# Altium PCB Brain_Stim_Final_Layout.PcbDoc (part 3 of 3)
Units mil, origin at the board's own origin, x right, y up, seen from the top; angles counter-clockwise.
Board outline 3530 x 5285 mil, 4 copper layers (Top Layer, Layer 1, Layer 2, Bottom Layer), stack 62.449 mil thick; 148 components, 116 nets, 618 pads, 378 vias.
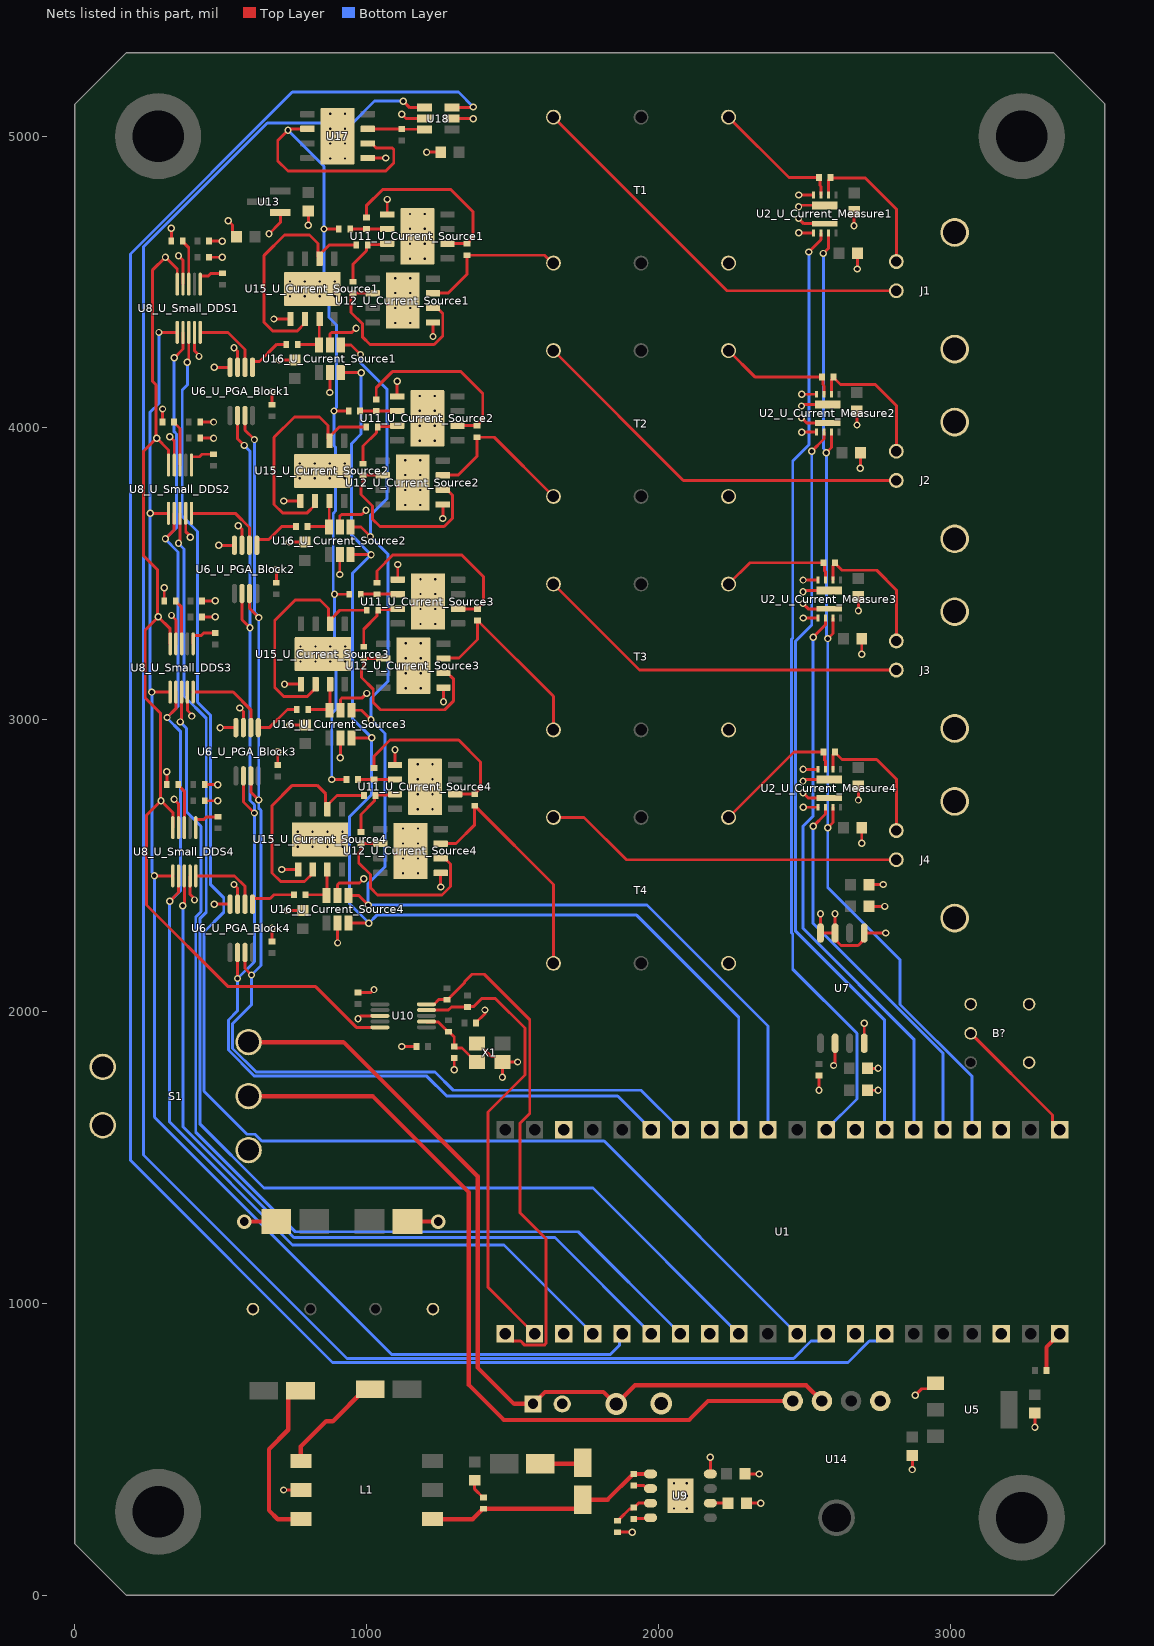
[diagram p4: the nets of this part, all layers, seen from the top]

## Via types
v1: diameter 25, hole 15, Top Layer to Bottom Layer, 234 vias
v2: diameter 19.68, hole 7.87, Top Layer to Bottom Layer, 58 vias
v3: diameter 19.68, hole 7.87, Top Layer to Bottom Layer, tented both sides, 52 vias
v4: diameter 19.68, hole 11.81, Top Layer to Bottom Layer, 27 vias
v5: diameter 50, hole 30, Top Layer to Bottom Layer, 5 vias
v6: diameter 75, hole 45, Top Layer to Bottom Layer, 2 vias

## Nets (pads, with @x,y where several pads share a name; then routed paths per layer and width w, separated by ;. In a path a pad name is that pad's centre, name@x,y a point inside that pad or via, vN(x,y) a via of type N, cw(c..) or ccw(c..) an arc to the next point about the centre after c; other vN are vias at no path point) (continued)
ADC_CLK: U1.GP2 U2_U_Current_Measure1.7 U2_U_Current_Measure2.7 U2_U_Current_Measure3.7 U2_U_Current_Measure4.7 | length 3525.8
  Top Layer w10: v1(2565,4597.99) 2582.8,4615.79 U2_U_Current_Measure1.7@2582.8,4668.5 ; v1(2575,3915) 2592.8,3932.8 U2_U_Current_Measure2.7@2592.8,3985.51 ; v1(2580,2629.53) 2597.8,2647.32 U2_U_Current_Measure4.7@2597.8,2700.04 ; v1(2580,3277.99) 2597.8,3295.79 U2_U_Current_Measure3.7@2597.8,3348.5
  Bottom Layer w10: v1(2565,4597.99) 2565,3929.06 2575,3919.06 v1(2575,3915) 2575,3287.05 2580,3282.05 v1(2580,3277.99) v1(2580,2629.53) 2580,2425 2827.5,2177.5 2827.5,2024.15 3075,1776.65 U1.GP2@3075,1595
ADC_DATA1: U1.GP6 U2_U_Current_Measure1.6 | length 3251.7
  Top Layer w10: v1(2515,4602.99) 2557.2,4645.2 U2_U_Current_Measure1.6@2557.2,4668.5
  Bottom Layer w10: v1(2515,4602.99) 2515,3941.82 2460,3886.82 2460,3279.8 2456,3275.8 2456,2269.2 2460,2265.2 2460,2145 2680,1925 2680,1700 U1.GP6@2575,1595
ADC_DATA2: U1.GP5 U2_U_Current_Measure2.6 | length 2557.1
  Top Layer w10: v1(2525,3920) 2567.2,3962.2 U2_U_Current_Measure2.6@2567.2,3985.51
  Bottom Layer w10: v1(2525,3920) 2525,3325 2470,3270 2470,2275 2775,1970 U1.GP5@2775,1595
ADC_DATA3: U1.GP4 U2_U_Current_Measure3.6 | length 1942.9
  Top Layer w10: v1(2530,3282.99) 2572.2,3325.2 U2_U_Current_Measure3.6@2572.2,3348.5
  Bottom Layer w10: v1(2530,3282.99) 2530,2670 2495,2635 2495,2285 2875,1905 U1.GP4@2875,1595
ADC_DATA4: U1.GP3 U2_U_Current_Measure4.6 | length 1306.8
  Top Layer w10: v1(2530,2634.53) 2572.2,2676.73 U2_U_Current_Measure4.6@2572.2,2700.04
  Bottom Layer w10: v1(2530,2634.53) 2530,2301.85 2975,1856.85 U1.GP3@2975,1595
AGND: C14_U_Current_Measure1.1 C14_U_Current_Measure2.1 C14_U_Current_Measure3.1 C14_U_Current_Measure4.1 C25.1 C26.1 U2_U_Current_Measure1.4 U2_U_Current_Measure1.9 U2_U_Current_Measure2.4 U2_U_Current_Measure2.9 U2_U_Current_Measure3.4 U2_U_Current_Measure3.9 U2_U_Current_Measure4.4 U2_U_Current_Measure4.9 U7.5 U7.7 U7.8 | length 1285.6
  Top Layer w10: v1(2480,4757.99) 2485,4762.99 U2_U_Current_Measure1.9@2570,4762.99 ; v1(2480.43,4798.43) U2_U_Current_Measure1.4@2531.61,4798.43 ; v1(2490,4075) 2495,4080 U2_U_Current_Measure2.9@2580,4080 ; v1(2490.43,4115.43) U2_U_Current_Measure2.4@2541.61,4115.43 ; v1(2495,2789.53) 2500,2794.53 U2_U_Current_Measure4.9@2585,2794.53 ; v1(2495,3437.99) 2500,3442.99 U2_U_Current_Measure3.9@2585,3442.99 ; v1(2495.43,2829.96) U2_U_Current_Measure4.4@2546.61,2829.96 ; v1(2495.43,3478.43) U2_U_Current_Measure3.4@2546.61,3478.43 ; v1(2555,2335) U7.8@2555,2268.98 U7.7@2605,2268.98 ; v1(2605,2335) U7.7@2605,2268.98 ; v1(2670,4692.99) C14_U_Current_Measure1.1@2670,4741.5 ; v1(2680,4010) C14_U_Current_Measure2.1@2680,4058.5 ; v1(2685,2724.53) C14_U_Current_Measure4.1@2685,2773.03 ; v1(2685,3372.99) C14_U_Current_Measure3.1@2685,3421.5 ; C25.1@2721.5,2360 v1(2775,2360) ; C26.1@2721.5,2435 v1(2770,2435) ; v1(2778.98,2268.98) U7.5@2705,2268.98 2705,2247.32 2684.19,2226.51 2625.81,2226.51 2605,2247.32 U7.7@2605,2268.98
ATT_\C\S\_U_Current_Source1: 
ATT_\C\S\_U_Current_Source2: 
ATT_\C\S\_U_Current_Source3: 
ATT_\C\S\_U_Current_Source4: 
ATT_C\S\: U1.GP8 U16_U_Current_Source1.4 U16_U_Current_Source2.4 U16_U_Current_Source3.4 U16_U_Current_Source4.4 | length 4261.1
  Top Layer w10: U16_U_Current_Source1.4@910.91,4283.74 946.26,4283.74 v1(978.5,4251.5) ; U16_U_Current_Source4.4@937.4,2397.24 972.76,2397.24 v1(1005,2365) ; U16_U_Current_Source2.4@945,3660 980.35,3660 v1(1012.6,3627.76) ; U16_U_Current_Source3.4@947.09,3032.24 982.44,3032.24 v1(1014.69,3000)
  Bottom Layer w10: v1(978.5,4251.5) 978.5,4223.32 1070.1,4131.72 1070.1,3758.44 1012.6,3700.94 v1(1012.6,3627.76) 1072.19,3568.17 1072.19,3130.68 1014.69,3073.18 v1(1014.69,3000) 1062.5,2952.19 1062.5,2495.68 1005,2438.18 v1(1005,2365) 1960,2365 2375,1950 U1.GP8@2375,1595
ATT_SIG_U_Current_Source1: R15_U_Current_Source1.2 U15_U_Current_Source1.3 U16_U_Current_Source1.6 | length 164.5
  Top Layer w10: R15_U_Current_Source1.2@763.19,4286.5 833.35,4286.5 U16_U_Current_Source1.6@836.1,4283.74 837.3,4284.94 837.3,4371.95 U15_U_Current_Source1.3@838.5,4373.15
ATT_SIG_U_Current_Source2: R15_U_Current_Source2.2 U15_U_Current_Source2.3 U16_U_Current_Source2.6 | length 164.5
  Top Layer w10: R15_U_Current_Source2.2@797.28,3662.76 867.44,3662.76 U16_U_Current_Source2.6@870.2,3660 871.4,3661.2 871.4,3748.21 U15_U_Current_Source2.3@872.6,3749.41
ATT_SIG_U_Current_Source3: R15_U_Current_Source3.2 U15_U_Current_Source3.3 U16_U_Current_Source3.6 | length 164.5
  Top Layer w10: R15_U_Current_Source3.2@799.37,3035 869.53,3035 U16_U_Current_Source3.6@872.28,3032.24 873.48,3033.44 873.48,3120.45 U15_U_Current_Source3.3@874.69,3121.65
ATT_SIG_U_Current_Source4: R15_U_Current_Source4.2 U15_U_Current_Source4.3 U16_U_Current_Source4.6 | length 164.5
  Top Layer w10: R15_U_Current_Source4.2@789.69,2400 859.84,2400 U16_U_Current_Source4.6@862.6,2397.24 863.8,2398.44 863.8,2485.45 U15_U_Current_Source4.3@865,2486.65
ATT_U/\D\_U_Current_Source1: 
ATT_U/\D\_U_Current_Source2: 
ATT_U/\D\_U_Current_Source3: 
ATT_U/\D\_U_Current_Source4: 
ATT_U/D\: U1.GP9 U16_U_Current_Source1.3 U16_U_Current_Source2.3 U16_U_Current_Source3.3 U16_U_Current_Source4.3 | length 4128.9
  Top Layer w10: U16_U_Current_Source1.3@910.91,4189.25 v1(980.75,4189.25) ; U16_U_Current_Source4.3@937.4,2302.76 v1(1007.24,2302.76) ; U16_U_Current_Source2.3@945,3565.51 v1(1014.84,3565.51) ; U16_U_Current_Source3.3@947.09,2937.76 v1(1016.93,2937.76)
  Bottom Layer w10: v1(980.75,4189.25) 980.75,3978.79 948.44,3946.49 948.44,3631.91 v1(1014.84,3565.51) 950.53,3501.2 950.53,3004.15 v1(1016.93,2937.76) 1016.93,2743.56 940.85,2667.47 940.85,2369.15 v1(1007.24,2302.76) 1034.49,2330 1925,2330 2275,1980 U1.GP9@2275,1595
CH_AMP1: R15_U_Current_Source1.1 U6_U_PGA_Block1.1 | length 157.5
  Top Layer w10: U6_U_PGA_Block1.1@608.39,4207.68 608.39,4223.72 611.95,4227.28 632.62,4227.28 691.83,4286.5 R15_U_Current_Source1.1@723.82,4286.5
CH_AMP2: R15_U_Current_Source2.1 U6_U_PGA_Block2.1 | length 170.9
  Top Layer w10: U6_U_PGA_Block2.1@623.39,3597.68 623.39,3613.72 626.95,3617.28 664.04,3617.28 709.51,3662.76 R15_U_Current_Source2.1@757.91,3662.76
CH_AMP3: R15_U_Current_Source3.1 U6_U_PGA_Block3.1 | length 157.4
  Top Layer w10: U6_U_PGA_Block3.1@628.39,2972.68 665.8,2972.68 728.12,3035 R15_U_Current_Source3.1@760,3035
CH_AMP4: R15_U_Current_Source4.1 U6_U_PGA_Block4.1 | length 164.7
  Top Layer w10: U6_U_PGA_Block4.1@608.39,2367.68 608.39,2383.72 611.95,2387.28 669.11,2387.28 681.83,2400 R15_U_Current_Source4.1@750.31,2400
CLK_SCL: R5.1 U1.GP17 U10.4 | length 1562.8
  Top Layer w10: U10.4@1204.72,2004.68 1279.45,2004.68 1290.08,2015.32 R5.1@1345,2015.32 1346.58,2016.89 1366.89,2016.89 1395,2045 1440,2045 1542.01,1942.99 1542.01,1782.01 1415.36,1655.36 1415.36,1054.64 U1.GP17@1575,895
CLK_SDA: R6.1 U1.GP16 U10.5 | length 1780.6
  Top Layer w10: U10.5@1204.72,2024.37 1230.31,2024.37 1246.26,2040.32 R6.1@1275,2040.32 1276.97,2040.32 1320,2083.35 1334.75,2098.09 1334.75,2101.57 1360.68,2127.5 1402.5,2127.5 1558.51,1971.49 1558.51,1650.61 1525,1617.1 1525,1310.14 1613.69,1221.45 1613.69,861.59 1608.41,856.31 1541.59,856.31 1527.59,870.31 1499.69,870.31 U1.GP16@1475,895
CS_MID_U_Current_Source1: R11_U_Current_Source1.2 R11_U_Current_Source2.2 R11_U_Current_Source3.2 R11_U_Current_Source4.2 U17.2 U17.6 | length 3270.5
  Top Layer w10: U17.6@796.65,5025 739.06,5025 734.06,5020 v1(730,5020) 695,4985 695,4915 730,4880 1065,4880 1092.5,4907.5 1092.5,4954.14 1086.64,4960 1032.13,4960 1017.13,4975 U17.2@1003.35,4975 ; v1(853.5,4681.5) R11_U_Current_Source1.2@903.82,4681.5 ; v1(880,2795) R11_U_Current_Source4.2@930.31,2795 ; v1(887.6,4057.76) R11_U_Current_Source2.2@937.91,4057.76 ; v1(889.69,3430) R11_U_Current_Source3.2@940,3430
  Bottom Layer w10: v1(730,5020) 853.5,4896.5 v1(853.5,4681.5) 853.5,4515.74 870.43,4498.81 870.43,4378.15 896,4352.58 896,4070.22 887.6,4061.81 v1(887.6,4057.76) 887.6,3939.04 893.03,3933.6 893.03,3714.99 885.1,3707.05 885.1,3438.65 889.69,3434.06 v1(889.69,3430) 889.69,3264.24 895.12,3258.81 895.12,3036.49 880,3021.38 v1(880,2795)
CS_OUT1: R12_U_Current_Source1.1 T1.1 U12_U_Current_Source1.3 | length 516.5
  Top Layer w10: U12_U_Current_Source1.3@1226.85,4461.5 1227.98,4462.63 1279.64,4462.63 1343.5,4526.5 R12_U_Current_Source1.1@1343.5,4591.81 1609.41,4591.81 1636.22,4565 T1.1@1640,4565
CS_OUT2: R12_U_Current_Source2.1 T2.1 U12_U_Current_Source2.3 | length 555.4
  Top Layer w10: U12_U_Current_Source2.3@1260.94,3837.76 1262.08,3838.89 1313.73,3838.89 1377.6,3902.76 R12_U_Current_Source2.1@1377.6,3968.07 1436.93,3968.07 T2.1@1640,3765
CS_OUT3: R12_U_Current_Source3.1 T3.1 U12_U_Current_Source3.3 | length 693.2
  Top Layer w10: U12_U_Current_Source3.3@1263.03,3210 1264.16,3211.13 1315.82,3211.13 1379.69,3275 R12_U_Current_Source3.1@1379.69,3340.31 1381.65,3340.31 1386.5,3335.47 1386.5,3333.5 1640,3080 T3.1@1640,2965
CS_OUT4: R12_U_Current_Source4.1 T4.1 U12_U_Current_Source4.3 | length 862.2
  Top Layer w10: U12_U_Current_Source4.3@1253.35,2575 1254.48,2576.13 1306.13,2576.13 1370,2640 R12_U_Current_Source4.1@1370,2705.32 1371.97,2705.32 1376.81,2700.47 1376.81,2698.5 1640,2435.32 T4.1@1640,2165
DDS_CLK: U8_U_Small_DDS1.5 U8_U_Small_DDS2.5 U8_U_Small_DDS3.5 U8_U_Small_DDS4.5 U10.10 | length 3756.2
  Top Layer w10: U8_U_Small_DDS2.5@320.63,3872.68 320.63,3924.37 v1(280,3965) ; U8_U_Small_DDS3.5@326.26,3260 326.26,3311.69 v1(285.63,3352.32) ; U8_U_Small_DDS4.5@335.31,2630 335.31,2681.69 v1(294.69,2722.32) ; U8_U_Small_DDS1.5@350.63,4492.68 350.63,4544.37 v1(310,4585) 265.18,4540.18 265.18,4160.26 277.81,4147.62 277.81,3967.19 v1(280,3965) ; U10.10@1045.28,1945.63 964.37,1945.63 825,2085 525,2085 245,2365 245,2672.64 v1(294.69,2722.32) ; v1(280,3965) 235.18,3920.18 235.18,3561.74 283.44,3513.47 283.44,3354.51 v1(285.63,3352.32) ; v1(285.63,3352.32) 240.81,3307.5 240.81,3074.19 292.5,3022.5 292.5,2724.51 v1(294.69,2722.32)
DDS_FSYNC1: U1.GP26_A0 U8_U_Small_DDS1.8 | length 5074.3
  Top Layer w10: v1(385,4225) 385,4229.06 390,4234.06 U8_U_Small_DDS1.8@390,4327.32
  Bottom Layer w10: v1(385,4225) 385,4146.75 367.81,4129.56 367.81,3697.19 420,3645 420,3060 464,3016 464,2436 510,2390 510,2340 442,2272 442,1726.85 589.61,1579.24 617.48,1579.24 640.4,1556.31 1813.69,1556.31 U1.GP26_A0@2475,895
DDS_FSYNC2: U1.GP22 U8_U_Small_DDS2.8 | length 4288
  Top Layer w10: v1(355,3605) 355,3609.06 360,3614.06 U8_U_Small_DDS2.8@360,3707.32
  Bottom Layer w10: v1(355,3605) 355,3603 373.44,3584.55 373.44,3081.56 450,3005 450,2340 428,2318 428,1615.2 648.2,1395 1775,1395 U1.GP22@2275,895
DDS_FSYNC3: U1.GP21 U8_U_Small_DDS3.8 | length 3495.1
  Top Layer w10: v1(360.63,2992.32) 360.63,2996.38 365.63,3001.38 U8_U_Small_DDS3.8@365.63,3094.65
  Bottom Layer w10: v1(360.63,2992.32) 382.5,2970.45 382.5,2684.13 432.19,2634.45 432.19,2341.98 414,2323.8 414,1586 755,1245 1725,1245 U1.GP21@2075,895
DDS_FSYNC4: U1.GP20 U8_U_Small_DDS4.8 | length 2760.9
  Top Layer w10: v1(369.69,2362.32) 369.69,2366.38 374.69,2371.38 U8_U_Small_DDS4.8@374.69,2464.65
  Bottom Layer w10: v1(369.69,2362.32) 369.69,1605.32 750,1225 1645,1225 U1.GP20@1975,895
DDS_OUT1: U6_U_PGA_Block1.2 U8_U_Small_DDS1.10 | length 238.9
  Top Layer w10: U8_U_Small_DDS1.10@429.37,4327.32 524.5,4327.32 582.8,4269.02 U6_U_PGA_Block1.2@582.8,4207.68
DDS_OUT2: U6_U_PGA_Block2.2 U8_U_Small_DDS2.10 | length 279.8
  Top Layer w10: U8_U_Small_DDS2.10@399.37,3707.32 549.5,3707.32 597.8,3659.02 U6_U_PGA_Block2.2@597.8,3597.68
DDS_OUT3: U6_U_PGA_Block3.2 U8_U_Small_DDS3.10 | length 284.3
  Top Layer w10: U8_U_Small_DDS3.10@405,3094.65 542.17,3094.65 602.8,3034.02 U6_U_PGA_Block3.2@602.8,2972.68
DDS_OUT4: U6_U_PGA_Block4.2 U8_U_Small_DDS4.10 | length 244.8
  Top Layer w10: U8_U_Small_DDS4.10@414.06,2464.65 547.17,2464.65 582.8,2429.02 U6_U_PGA_Block4.2@582.8,2367.68
DDS_SCLK: U1.GP18 U8_U_Small_DDS1.7 U8_U_Small_DDS2.7 U8_U_Small_DDS3.7 U8_U_Small_DDS4.7 | length 4856.6
  Top Layer w10: v1(310,3620) 339.97,3649.97 339.97,3706.98 U8_U_Small_DDS2.7@340.31,3707.32 ; v1(315.63,3007.32) 345.6,3037.29 345.6,3094.3 U8_U_Small_DDS3.7@345.94,3094.65 ; v1(324.69,2377.32) 354.65,2407.29 354.65,2464.3 U8_U_Small_DDS4.7@355,2464.65 ; v1(340,4240) 369.97,4269.97 369.97,4326.98 U8_U_Small_DDS1.7@370.31,4327.32
  Bottom Layer w10: v1(340,4240) 340,3986.82 347.5,3979.32 347.5,3657.5 v1(310,3620) 310,3618.18 353.13,3575.05 353.13,3044.82 v1(315.63,3007.32) 315.63,3005.5 362.19,2958.95 362.19,2414.82 v1(324.69,2377.32) 324.69,1620.72 745.4,1200 1470,1200 U1.GP18@1775,895
DDS_SDAT: U1.GP19 U8_U_Small_DDS1.6 U8_U_Small_DDS2.6 U8_U_Small_DDS3.6 U8_U_Small_DDS4.6 | length 4946
  Top Layer w10: v1(257.68,3707.32) U8_U_Small_DDS2.6@320.63,3707.32 ; v1(263.31,3094.65) U8_U_Small_DDS3.6@326.26,3094.65 ; v1(272.36,2464.65) U8_U_Small_DDS4.6@335.31,2464.65 ; v1(287.68,4327.32) U8_U_Small_DDS1.6@350.63,4327.32
  Bottom Layer w10: v1(287.68,4327.32) 287.68,4083.87 257.5,4053.69 257.5,3707.5 v1(257.68,3707.32) 257.68,3104.33 263.31,3098.7 v1(263.31,3094.65) 263.31,2477.76 272.36,2468.7 v1(272.36,2464.65) 272.36,1637.64 1085,825 1835,825 1866.17,856.17 1866.17,886.17 U1.GP19@1875,895
FROM_BRAIN1: J1.2 R7_U_Current_Measure1.1 U2_U_Current_Measure1.2 | length 509.6
  Top Layer w10: U2_U_Current_Measure1.2@2582.8,4798.43 2582.8,4849.13 2589.69,4856.02 2708.79,4856.02 2815,4749.81 J1.2@2815,4570
FROM_BRAIN2: J2.2 R7_U_Current_Measure2.1 U2_U_Current_Measure2.2 | length 472.4
  Top Layer w10: U2_U_Current_Measure2.2@2592.8,4115.43 2592.8,4166.14 2599.69,4173.03 2623.52,4149.2 2742.62,4149.2 2815,4076.82 J2.2@2815,3920
FROM_BRAIN3: J3.2 R7_U_Current_Measure3.1 U2_U_Current_Measure3.2 | length 483.4
  Top Layer w10: U2_U_Current_Measure3.2@2597.8,3478.43 2597.8,3529.13 2604.69,3536.02 2628.52,3512.19 2747.62,3512.19 2815,3444.81 J3.2@2815,3270
FROM_BRAIN4: J4.2 R7_U_Current_Measure4.1 U2_U_Current_Measure4.2 | length 484.9
  Top Layer w10: U2_U_Current_Measure4.2@2597.8,2829.96 2597.8,2880.67 2604.69,2887.56 2628.52,2863.72 2747.62,2863.72 2815,2796.35 J4.2@2815,2620
GND: B?.3 B?.M1 B?.M2 C2.2 C3.1 C4.1 C5.1 C6.1 C7.1 C8.1 C9.1 C10.1 C11.1 C12_U_Current_Source1.1 C12_U_Current_Source2.1 C12_U_Current_Source3.1 C12_U_Current_Source4.1 C13.1 C15_U_Current_Measure1.1 C15_U_Current_Measure2.1 C15_U_Current_Measure3.1 C15_U_Current_Measure4.1 C20.1 C21.1 C22_U_PGA_Block1.1 C22_U_PGA_Block2.1 C22_U_PGA_Block3.1 C22_U_PGA_Block4.1 C23.1 C24.1 C28_U_Small_DDS1.1 C28_U_Small_DDS2.1 C28_U_Small_DDS3.1 C28_U_Small_DDS4.1 C29_U_Small_DDS1.1 C29_U_Small_DDS2.1 C29_U_Small_DDS3.1 C29_U_Small_DDS4.1 C30_U_Small_DDS1.1 C30_U_Small_DDS2.1 C30_U_Small_DDS3.1 C30_U_Small_DDS4.1 D2.2 D3.1 J1.3 J1.4 J2.3 J2.4 J3.3 J3.4 J4.3 J4.4 L1.5 P1.2 R4.1 R8.1 S1.1 S1.4 S1.5 T1.3 T2.3 T3.3 T4.3 U1.AGND U1.GND U1.GND2 U1.GND3 U1.GND4 U1.GND5 U1.GND6 U1.GND7 U2_U_Current_Measure1.5 U2_U_Current_Measure1.10 U2_U_Current_Measure2.5 U2_U_Current_Measure2.10 U2_U_Current_Measure3.5 U2_U_Current_Measure3.10 U2_U_Current_Measure4.5 U2_U_Current_Measure4.10 U5.1 U6_U_PGA_Block1.3 U6_U_PGA_Block1.4 U6_U_PGA_Block2.3 U6_U_PGA_Block2.4 U6_U_PGA_Block3.3 U6_U_PGA_Block3.4 U6_U_PGA_Block4.3 U6_U_PGA_Block4.4 U7.2 U7.4 U8_U_Small_DDS1.4 U8_U_Small_DDS1.9 U8_U_Small_DDS2.4 U8_U_Small_DDS2.9 U8_U_Small_DDS3.4 U8_U_Small_DDS3.9 U8_U_Small_DDS4.4 U8_U_Small_DDS4.9 U9.4 U9.9 U10.8 U11_U_Current_Source1.1 U11_U_Current_Source1.9@1173.5,4656.5 U11_U_Current_Source2.1 U11_U_Current_Source2.9@1207.6,4032.76 U11_U_Current_Source3.1 U11_U_Current_Source3.9@1209.69,3405 U11_U_Current_Source4.1 U11_U_Current_Source4.9@1200,2770 U12_U_Current_Source1.1 U12_U_Current_Source1.9@1123.5,4436.5 U12_U_Current_Source2.1 U12_U_Current_Source2.9@1157.6,3812.76 U12_U_Current_Source3.1 U12_U_Current_Source3.9@1159.69,3185 U12_U_Current_Source4.1 U12_U_Current_Source4.9@1150,2550 U13.1 U14.4 U15_U_Current_Source1.1 U15_U_Current_Source1.9@813.5,4476.5 U15_U_Current_Source2.1 U15_U_Current_Source2.9@847.6,3852.76 U15_U_Current_Source3.1 U15_U_Current_Source3.9@849.69,3225 U15_U_Current_Source4.1 U15_U_Current_Source4.9@840,2590 U16_U_Current_Source1.2 U16_U_Current_Source1.5 U16_U_Current_Source2.2 U16_U_Current_Source2.5 U16_U_Current_Source3.2 U16_U_Current_Source3.5 U16_U_Current_Source4.2 U16_U_Current_Source4.5 U17.1 U17.9@900,5000 U18.2 U18.5 X1.2 X1.4 | length 6365.8
  Top Layer w10: C30_U_Small_DDS2.1@300.31,4020 v1(300.31,4064.69) ; C30_U_Small_DDS3.1@305.94,3407.32 v1(305.94,3452.01) ; C30_U_Small_DDS4.1@315,2777.32 v1(315,2822.01) ; v1(325,3970) 340.31,3954.69 U8_U_Small_DDS2.4@340.31,3872.68 ; C30_U_Small_DDS1.1@330.31,4640 v1(330.31,4684.69) ; v1(330.63,3357.32) 345.94,3342.01 U8_U_Small_DDS3.4@345.94,3260 ; v1(339.69,2727.32) 355,2712.01 U8_U_Small_DDS4.4@355,2630 ; v1(355,4590) 370.31,4574.69 U8_U_Small_DDS1.4@370.31,4492.68 ; U8_U_Small_DDS2.9@379.69,3707.32 379.69,3644.37 395,3629.06 v1(395,3625) ; U8_U_Small_DDS3.9@385.31,3094.65 385.31,3031.7 400.63,3016.38 v1(400.63,3012.32) ; U8_U_Small_DDS4.9@394.37,2464.65 394.37,2401.7 409.69,2386.38 v1(409.69,2382.32) ; U8_U_Small_DDS1.9@409.69,4327.32 409.69,4264.37 425,4249.06 v1(425,4245) ; C29_U_Small_DDS2.1@429.69,3965 v1(475,3965) ; C28_U_Small_DDS2.1@429.69,4020 v1(475,4020) ; C29_U_Small_DDS3.1@435.31,3352.32 v1(480.63,3352.32) ; C28_U_Small_DDS3.1@435.31,3407.32 v1(480.63,3407.32) ; C29_U_Small_DDS4.1@444.37,2722.32 v1(489.69,2722.32) ; C28_U_Small_DDS4.1@444.37,2777.32 v1(489.69,2777.32) ; C29_U_Small_DDS1.1@459.69,4585 v1(505,4585) ; C28_U_Small_DDS1.1@459.69,4640 v1(505,4640) ; v1(477.32,2367.68) U6_U_PGA_Block4.4@531.61,2367.68 ; v1(477.32,4207.68) U6_U_PGA_Block1.4@531.61,4207.68 ; v1(492.32,3597.68) U6_U_PGA_Block2.4@546.61,3597.68 ; v1(497.32,2972.68) U6_U_PGA_Block3.4@551.61,2972.68 ; v1(525,4710) 539.8,4695.2 539.8,4668.7 C10.1@553.5,4655 ; v1(545,2435) 557.2,2422.8 U6_U_PGA_Block4.3@557.2,2367.68 ; v1(545,4275) 557.2,4262.8 U6_U_PGA_Block1.3@557.2,4207.68 ; v1(560,3665) 572.2,3652.8 U6_U_PGA_Block2.3@572.2,3597.68 ; v1(565,3040) 577.2,3027.8 U6_U_PGA_Block3.3@577.2,2972.68 ; v1(665,4665) 703.74,4703.74 U13.1@703.74,4737.6 ; C22_U_PGA_Block4.1@675,2239.68 v1(675,2285) ; C22_U_PGA_Block1.1@675,4079.69 v1(675,4125) ; v1(681.85,4373.15) U15_U_Current_Source1.1@738.5,4373.15 ; C22_U_PGA_Block2.1@690,3469.69 v1(690,3515) ; C22_U_PGA_Block3.1@695,2844.68 v1(695,2890) ; v1(700,4232.99) C12_U_Current_Source1.1@753.5,4232.99 ; v1(708.35,2486.65) U15_U_Current_Source4.1@765,2486.65 ; v1(715,360) L1.5@774.21,360 ; v1(715.94,3749.41) U15_U_Current_Source2.1@772.6,3749.41 ; v1(718.03,3121.65) U15_U_Current_Source3.1@774.69,3121.65 ; v1(726.5,2346.5) C12_U_Current_Source4.1@780,2346.5 ; v1(734.09,3609.25) C12_U_Current_Source2.1@787.6,3609.25 ; v1(736.18,2981.5) C12_U_Current_Source3.1@789.69,2981.5 ; v1(800,4695) C11.1@800,4743.5 ; v1(873.5,4121.5) U16_U_Current_Source1.2@873.5,4189.25 ; U16_U_Current_Source1.5@873.5,4283.74 873.5,4320.64 879.36,4326.5 948.5,4326.5 v1(963.5,4341.5) ; v1(900,2235) U16_U_Current_Source4.2@900,2302.76 ; U16_U_Current_Source4.5@900,2397.24 900,2434.14 905.86,2440 975,2440 v1(990,2455) ; v1(907.6,3497.76) U16_U_Current_Source2.2@907.6,3565.51 ; U16_U_Current_Source2.5@907.6,3660 907.6,3696.9 913.46,3702.76 982.6,3702.76 v1(997.6,3717.76) ; v1(909.69,2870) U16_U_Current_Source3.2@909.69,2937.76 ; U16_U_Current_Source3.5@909.69,3032.24 909.69,3069.14 915.54,3075 984.69,3075 v1(999.69,3090) ; v1(970,1975) 980,1985 U10.8@1045.28,1985 ; C9.1@970,2064.68 1014.69,2064.68 v1(1025,2075) ; U17.1@1003.35,4925 v1(1065,4925) ; U11_U_Current_Source1.1@1070.16,4731.5 v1(1070.16,4783.15) ; U11_U_Current_Source4.1@1096.65,2845 v1(1096.65,2896.65) ; U11_U_Current_Source2.1@1104.25,4107.76 v1(1104.25,4159.41) ; U11_U_Current_Source3.1@1106.34,3480 v1(1106.34,3531.65) ; v1(1120,1880) C8.1@1170.31,1880 ; v1(1120,5075) 1135,5060 U18.5@1197.76,5060 ; v1(1205,4945) C13.1@1253.5,4945 ; v1(1226.85,4313.15) U12_U_Current_Source1.1@1226.85,4361.5 ; v1(1253.35,2426.65) U12_U_Current_Source4.1@1253.35,2475 ; v1(1260.94,3689.41) U12_U_Current_Source2.1@1260.94,3737.76 ; v1(1263.03,3061.65) U12_U_Current_Source3.1@1263.03,3110 ; U18.2@1292.24,5060 v1(1365,5060) ; v1(1300,1800) C7.1@1300,1840.32 ; C6.1@1374.69,1960 1374.69,1961.97 1405,1992.28 v1(1405,2005) ; X1.4@1378.39,1890 1382.32,1890 1426.69,1845.63 1446.38,1845.63 X1.2@1465,1827.01 ; v1(1465,1775) X1.2@1465,1827.01 ; v1(1517.01,1827.01) X1.2@1465,1827.01 ; R4.1@1860,215.32 v1(1909.69,215.32) ; U9.4@2177.42,415 v1(2177.42,472.58) ; C3.1@2296.5,415 v1(2345,415) ; C5.1@2301.5,315 v1(2350,315) ; v1(2480,4717.99) 2497.99,4700 U2_U_Current_Measure1.10@2570,4700 ; v1(2480.51,4668.5) U2_U_Current_Measure1.5@2531.61,4668.5 ; v1(2490,4035) 2507.99,4017.01 U2_U_Current_Measure2.10@2580,4017.01 ; v1(2490.51,3985.51) U2_U_Current_Measure2.5@2541.61,3985.51 ; v1(2495,2749.53) 2512.99,2731.54 U2_U_Current_Measure4.10@2585,2731.54 ; v1(2495,3397.99) 2512.99,3380 U2_U_Current_Measure3.10@2585,3380 ; v1(2495.51,2700.04) U2_U_Current_Measure4.5@2546.61,2700.04 ; v1(2495.51,3348.5) U2_U_Current_Measure3.5@2546.61,3348.5 ; v1(2550,1730) R8.1@2550,1780.32 ; v1(2600,1815) 2605,1820 U7.2@2605,1891.02 ; v1(2681.5,4544.49) C15_U_Current_Measure1.1@2681.5,4597.99 ; v1(2691.5,3861.5) C15_U_Current_Measure2.1@2691.5,3915 ; v1(2696.5,2576.02) C15_U_Current_Measure4.1@2696.5,2629.53 ; v1(2696.5,3224.49) C15_U_Current_Measure3.1@2696.5,3277.99 ; U7.4@2705,1891.02 v1(2705,1960) ; C23.1@2716.5,1730 v1(2752.5,1730) ; C24.1@2716.5,1805 v1(2752.5,1805) ; v1(2870,430) C20.1@2870,478.5 ; v1(2880,685) 2901.93,706.93 2930.39,706.93 U5.1@2949.02,725.55 ; v1(3290,575) C21.1@3290,623.5
  Top Layer w15: v5(580,1280) D2.2@690.04,1280 ; D3.1@1139.96,1280 v5(1245,1280)
  other v2: 2053.35,296.69 2096.65,296.69 2053.35,340 2096.65,340 2053.35,383.31 2096.65,383.31 1124.41,2524.41 1175.59,2524.41 814.41,2564.41 865.59,2564.41 1124.41,2575.59 1175.59,2575.59 814.41,2615.59 865.59,2615.59 1174.41,2744.41 1225.59,2744.41 1174.41,2795.59 1225.59,2795.59 1134.09,3159.41 1185.28,3159.41 824.09,3199.41 875.28,3199.41 1134.09,3210.59 1185.28,3210.59 824.09,3250.59 875.28,3250.59 1184.09,3379.41 1235.28,3379.41 1184.09,3430.59 1235.28,3430.59 1132.01,3787.17 1183.19,3787.17 822.01,3827.17 873.19,3827.17 1132.01,3838.35 1183.19,3838.35 822.01,3878.35 873.19,3878.35 1182.01,4007.17 1233.19,4007.17 1182.01,4058.35 1233.19,4058.35 1097.91,4410.91 1149.09,4410.91 787.91,4450.91 839.09,4450.91 1097.91,4462.09 1149.09,4462.09 787.91,4502.09 839.09,4502.09 1147.91,4630.91 1199.09,4630.91 1147.91,4682.09 1199.09,4682.09 874.41,4974.41 925.59,4974.41 874.41,5025.59 925.59,5025.59
  other v3: 1124.41,2473.23 1175.59,2473.23 763.23,2564.41 916.77,2564.41 763.23,2615.59 916.77,2615.59 1124.41,2626.77 1175.59,2626.77 1174.41,2693.23 1225.59,2693.23 1174.41,2846.77 1225.59,2846.77 1134.09,3108.23 1185.28,3108.23 772.91,3199.41 926.46,3199.41 772.91,3250.59 926.46,3250.59 1134.09,3261.77 1185.28,3261.77 1184.09,3328.23 1235.28,3328.23 1184.09,3481.77 1235.28,3481.77 1132.01,3735.98 1183.19,3735.98 770.83,3827.17 924.37,3827.17 770.83,3878.35 924.37,3878.35 1132.01,3889.53 1183.19,3889.53 1182.01,3955.98 1233.19,3955.98 1182.01,4109.53 1233.19,4109.53 1097.91,4359.72 1149.09,4359.72 736.73,4450.91 890.28,4450.91 736.73,4502.09 890.28,4502.09 1097.91,4513.27 1149.09,4513.27 1147.91,4579.72 1199.09,4579.72 1147.91,4733.27 1199.09,4733.27 874.41,4923.23 925.59,4923.23 874.41,5076.77 925.59,5076.77
  other v6: 2009.35,656.17
MP_C\S\: U1.GP27_A1 U18.4 | length 6955.1
  Top Layer w10: v1(1125,5120) 1147.6,5097.4 U18.4@1197.76,5097.4
  Bottom Layer w10: v1(1125,5120) 1026.82,5120 952.25,5045.43 659.24,5045.43 235,4621.19 235,1508.5 932.5,811 2463.1,811 2522.41,870.31 2550.31,870.31 U1.GP27_A1@2575,895
MP_U/D\: U1.GP28_A2 U18.3 | length 7518.4
  Top Layer w10: U18.3@1292.24,5097.4 1293.54,5098.7 1363.7,5098.7 v1(1365,5100)
  Bottom Layer w10: v1(1365,5100) 1314.15,5150.85 744.86,5150.85 190,4595.99 190,1490 883,797 2649.1,797 2722.41,870.31 2750.31,870.31 U1.GP28_A2@2775,895
NetC1_1: C1.1 R1.2 | length 72.4
  Top Layer w10: C1.1@1370,393.5 1370,362.72 1398.03,334.69 R1.2@1400,334.69
NetC5_2: C5.2 U9.2 | length 61.1
  Top Layer w10: U9.2@2177.42,315 C5.2@2238.5,315
NetC27_U_Small_DDS1_1: C27_U_Small_DDS1.1 U8_U_Small_DDS1.1 | length 107.1
  Top Layer w10: U8_U_Small_DDS1.1@429.37,4492.68 429.37,4520.31 430.21,4521.14 457.25,4521.14 465.8,4529.69 C27_U_Small_DDS1.1@505,4529.69
NetC27_U_Small_DDS2_1: C27_U_Small_DDS2.1 U8_U_Small_DDS2.1 | length 107.1
  Top Layer w10: U8_U_Small_DDS2.1@399.37,3872.68 399.37,3900.31 400.21,3901.14 427.25,3901.14 435.8,3909.69 C27_U_Small_DDS2.1@475,3909.69
NetC27_U_Small_DDS3_1: C27_U_Small_DDS3.1 U8_U_Small_DDS3.1 | length 107.1
  Top Layer w10: U8_U_Small_DDS3.1@405,3260 405,3287.63 405.84,3288.46 432.88,3288.46 441.43,3297.01 C27_U_Small_DDS3.1@480.63,3297.01
NetC27_U_Small_DDS4_1: C27_U_Small_DDS4.1 U8_U_Small_DDS4.1 | length 107.1
  Top Layer w10: U8_U_Small_DDS4.1@414.06,2630 414.06,2657.63 414.89,2658.46 441.94,2658.46 450.48,2667.01 C27_U_Small_DDS4.1@489.69,2667.01
NetC30_U_Small_DDS1_2: C30_U_Small_DDS1.2 U8_U_Small_DDS1.3 | length 155.7
  Top Layer w10: C30_U_Small_DDS1.2@369.69,4640 369.69,4638.03 390,4617.72 U8_U_Small_DDS1.3@390,4492.68
NetC30_U_Small_DDS2_2: C30_U_Small_DDS2.2 U8_U_Small_DDS2.3 | length 155.7
  Top Layer w10: C30_U_Small_DDS2.2@339.69,4020 339.69,4018.03 360,3997.72 U8_U_Small_DDS2.3@360,3872.68
NetC30_U_Small_DDS3_2: C30_U_Small_DDS3.2 U8_U_Small_DDS3.3 | length 155.7
  Top Layer w10: C30_U_Small_DDS3.2@345.31,3407.32 345.31,3405.35 365.63,3385.04 U8_U_Small_DDS3.3@365.63,3260
NetC30_U_Small_DDS4_2: C30_U_Small_DDS4.2 U8_U_Small_DDS4.3 | length 155.7
  Top Layer w10: C30_U_Small_DDS4.2@354.37,2777.32 354.37,2775.35 374.69,2755.04 U8_U_Small_DDS4.3@374.69,2630
NetD1_2: D1.2 L1.6 | length 587.3
  Top Layer w15: D1.2@772.99,700 754.29,700 731.28,676.99 731.28,566.28 665,500 665,290 695,260 L1.6@774.21,260
NetD4_1: D4.1 L1.4 | length 368.1
  Top Layer w15: L1.4@774.21,460 774.21,509.21 860.6,595.6 883.91,595.6 993.31,705 D4.1@1012.01,705
NetD5_1: D5.1 D6.1 | length 146.2
  Top Layer w15: D5.1@1595,450 1737.01,450 D6.1@1740,452.99
NetR2_2: R2.2 U9.6 | length 61.9
  Top Layer w10: R2.2@1915,375.31 1949.33,375.31 1959.65,365 U9.6@1972.58,365
NetR3_2: R3.2 R4.2 U9.7 | length 138.7
  Top Layer w10: R4.2@1860,254.69 1861.97,254.69 1866.81,259.53 1866.81,261.5 1900.16,294.84 1910.16,294.84 R3.2@1915,299.69 1916.97,299.69 1932.28,315 U9.7@1972.58,315
NetR10_U_Current_Source1_1: R10_U_Current_Source1.1 R11_U_Current_Source1.1 U11_U_Current_Source1.2 | length 127.2
  Top Layer w10: R11_U_Current_Source1.1@943.19,4681.5 943.35,4681.65 998.35,4681.65 R10_U_Current_Source1.1@998.5,4681.81 998.66,4681.65 1070,4681.65 U11_U_Current_Source1.2@1070.16,4681.5
NetR10_U_Current_Source1_2: R10_U_Current_Source1.2 R12_U_Current_Source1.2 U11_U_Current_Source1.6 | length 645.7
  Top Layer w10: R10_U_Current_Source1.2@998.5,4721.18 998.5,4761.5 1053.5,4816.5 1288.5,4816.5 1363.5,4741.5 1363.5,4652.57 1350.31,4639.38 1350.31,4636.02 1345.47,4631.18 R12_U_Current_Source1.2@1343.5,4631.18 1343.35,4631.34 1277.01,4631.34 U11_U_Current_Source1.6@1276.85,4631.5
NetR10_U_Current_Source2_1: R10_U_Current_Source2.1 R11_U_Current_Source2.1 U11_U_Current_Source2.2 | length 127.2
  Top Layer w10: R11_U_Current_Source2.1@977.28,4057.76 977.44,4057.91 1032.44,4057.91 R10_U_Current_Source2.1@1032.6,4058.07 1032.76,4057.91 1104.09,4057.91 U11_U_Current_Source2.2@1104.25,4057.76
NetR10_U_Current_Source2_2: R10_U_Current_Source2.2 R12_U_Current_Source2.2 U11_U_Current_Source2.6 | length 645.7
  Top Layer w10: R10_U_Current_Source2.2@1032.6,4097.44 1032.6,4137.76 1087.6,4192.76 1322.6,4192.76 1397.6,4117.76 1397.6,4028.83 1384.41,4015.64 1384.41,4012.28 1379.57,4007.44 R12_U_Current_Source2.2@1377.6,4007.44 1377.44,4007.6 1311.1,4007.6 U11_U_Current_Source2.6@1310.94,4007.76
NetR10_U_Current_Source3_1: R10_U_Current_Source3.1 R11_U_Current_Source3.1 U11_U_Current_Source3.2 | length 127.2
  Top Layer w10: R11_U_Current_Source3.1@979.37,3430 979.53,3430.16 1034.53,3430.16 R10_U_Current_Source3.1@1034.69,3430.31 1034.84,3430.16 1106.18,3430.16 U11_U_Current_Source3.2@1106.34,3430
NetR10_U_Current_Source3_2: R10_U_Current_Source3.2 R12_U_Current_Source3.2 U11_U_Current_Source3.6 | length 645.7
  Top Layer w10: R10_U_Current_Source3.2@1034.69,3469.69 1034.69,3510 1089.69,3565 1324.69,3565 1399.69,3490 1399.69,3401.08 1386.5,3387.89 1386.5,3384.53 1381.65,3379.69 R12_U_Current_Source3.2@1379.69,3379.69 1379.53,3379.84 1313.19,3379.84 U11_U_Current_Source3.6@1313.03,3380
NetR10_U_Current_Source4_1: R10_U_Current_Source4.1 R11_U_Current_Source4.1 U11_U_Current_Source4.2 | length 127.2
  Top Layer w10: R11_U_Current_Source4.1@969.69,2795 969.84,2795.16 1024.84,2795.16 R10_U_Current_Source4.1@1025,2795.32 1025.16,2795.16 1096.5,2795.16 U11_U_Current_Source4.2@1096.65,2795
NetR10_U_Current_Source4_2: R10_U_Current_Source4.2 R12_U_Current_Source4.2 U11_U_Current_Source4.6 | length 645.7
  Top Layer w10: R10_U_Current_Source4.2@1025,2834.69 1025,2875 1080,2930 1315,2930 1390,2855 1390,2766.08 1376.81,2752.89 1376.81,2749.53 1371.97,2744.69 R12_U_Current_Source4.2@1370,2744.69 1369.84,2744.84 1303.5,2744.84 U11_U_Current_Source4.6@1303.35,2745
NetR13_U_Current_Source1_1: R13_U_Current_Source1.1 R14_U_Current_Source1.2 U11_U_Current_Source1.3 | length 214.9
  Top Layer w10: R14_U_Current_Source1.2@953.5,4501.18 953.5,4561.5 999.41,4607.41 999.41,4622.72 1005.69,4629 1067.66,4629 U11_U_Current_Source1.3@1070.16,4631.5
NetR13_U_Current_Source2_1: R13_U_Current_Source2.1 R14_U_Current_Source2.2 U11_U_Current_Source2.3 | length 214.9
  Top Layer w10: R14_U_Current_Source2.2@987.6,3877.44 987.6,3937.76 1033.51,3983.67 1033.51,3998.98 1039.78,4005.26 1101.75,4005.26 U11_U_Current_Source2.3@1104.25,4007.76
NetR13_U_Current_Source3_1: R13_U_Current_Source3.1 R14_U_Current_Source3.2 U11_U_Current_Source3.3 | length 214.9
  Top Layer w10: R14_U_Current_Source3.2@989.69,3249.69 989.69,3310 1035.59,3355.91 1035.59,3371.22 1041.87,3377.5 1103.84,3377.5 U11_U_Current_Source3.3@1106.34,3380
NetR13_U_Current_Source4_1: R13_U_Current_Source4.1 R14_U_Current_Source4.2 U11_U_Current_Source4.3 | length 214.9
  Top Layer w10: R14_U_Current_Source4.2@980,2614.69 980,2675 1025.91,2720.91 1025.91,2736.22 1032.19,2742.5 1094.15,2742.5 U11_U_Current_Source4.3@1096.65,2745
NetR14_U_Current_Source1_1: R14_U_Current_Source1.1 U12_U_Current_Source1.2 U12_U_Current_Source1.6 | length 654.4
  Top Layer w10: U12_U_Current_Source1.6@1020.16,4461.5 1020,4461.65 953.66,4461.65 R14_U_Current_Source1.1@953.5,4461.81 951.54,4461.81 946.69,4456.97 946.69,4455 946,4454.31 946,4395.82 986,4355.82 986,4310.48 1010.84,4285.65 1231.17,4285.65 1260.46,4314.94 1260.46,4391.67 1240.63,4411.5 U12_U_Current_Source1.2@1226.85,4411.5
NetR14_U_Current_Source2_1: R14_U_Current_Source2.1 U12_U_Current_Source2.2 U12_U_Current_Source2.6 | length 653.2
  Top Layer w10: U12_U_Current_Source2.6@1054.25,3837.76 1054.09,3837.91 987.76,3837.91 R14_U_Current_Source2.1@987.6,3838.07 987.6,3806.4 980.1,3798.9 980.1,3772.08 1020.1,3732.08 1020.1,3686.74 1044.93,3661.91 1265.26,3661.91 1294.55,3691.2 1294.55,3767.93 1274.72,3787.76 U12_U_Current_Source2.2@1260.94,3787.76
NetR14_U_Current_Source3_1: R14_U_Current_Source3.1 U12_U_Current_Source3.2 U12_U_Current_Source3.6 | length 653.2
  Top Layer w10: R14_U_Current_Source3.1@989.69,3210.31 R14_U_Current_Source3.1@989.84,3210.16 ; U12_U_Current_Source3.6@1056.34,3210 1056.18,3210.16 R14_U_Current_Source3.1@989.84,3210.16 ; U12_U_Current_Source3.2@1263.03,3160 1276.81,3160 1296.64,3140.17 1296.64,3063.44 1267.35,3034.15 1047.02,3034.15 1022.19,3058.99 1022.19,3104.32 982.19,3144.32 982.19,3174.17 990,3181.98 990,3210 R14_U_Current_Source3.1@989.84,3210.16
NetR14_U_Current_Source4_1: R14_U_Current_Source4.1 U12_U_Current_Source4.2 U12_U_Current_Source4.6 | length 653.2
  Top Layer w10: U12_U_Current_Source4.6@1046.65,2575 1046.5,2575.16 980.16,2575.16 R14_U_Current_Source4.1@980,2575.32 980,2550.23 972.5,2542.73 972.5,2509.32 1012.5,2469.32 1012.5,2423.99 1037.33,2399.15 1257.67,2399.15 1286.95,2428.44 1286.95,2505.17 1267.13,2525 U12_U_Current_Source4.2@1253.35,2525
NetR16_2: R16.2 U17.3 U18.6 | length 195.4
  Top Layer w10: U17.3@1003.35,5025 1003.5,5024.84 1119.84,5024.84 R16.2@1120,5024.69 1121.04,5023.64 1196.71,5023.64 U18.6@1197.76,5022.6
NetRUSB_2: RUSB.2 U1.VBUS | length 143.8
  Top Layer w15: RUSB.2@3329.69,770 3329.69,849.69 U1.VBUS@3375,895
PGA_SCK: U1.GP10 U6_U_PGA_Block1.7 U6_U_PGA_Block2.7 U6_U_PGA_Block3.7 U6_U_PGA_Block4.7 | length 4158.1
  Top Layer w10: U6_U_PGA_Block4.7@582.8,2202.32 582.8,2147.2 v1(605,2125) ; U6_U_PGA_Block1.7@582.8,4042.32 582.8,3992.2 v1(615,3960) ; U6_U_PGA_Block2.7@597.8,3432.32 597.8,3382.2 v1(630,3350) ; U6_U_PGA_Block3.7@602.8,2807.32 602.8,2752.2 v1(630,2725)
  Bottom Layer w10: v1(615,3960) 615,3369.06 630,3354.06 v1(630,3350) v1(630,2725) 630,2696.82 637.5,2689.32 637.5,2157.5 v1(605,2125) 605,2022.97 540,1957.97 540,1873.28 621.01,1792.28 1234.37,1792.28 1296.64,1730 1940,1730 U1.GP10@2075,1595
PGA_SI: U1.GP11 U6_U_PGA_Block1.6 U6_U_PGA_Block2.6 U6_U_PGA_Block3.6 U6_U_PGA_Block4.6 | length 4158.9
  Top Layer w10: v1(557.2,2112.8) U6_U_PGA_Block4.6@557.2,2202.32 ; U6_U_PGA_Block1.6@557.2,4042.32 557.2,3962.8 v1(580,3940) ; U6_U_PGA_Block2.6@572.2,3432.32 572.2,3342.8 v1(600,3315) ; U6_U_PGA_Block3.6@577.2,2807.32 577.2,2717.8 v1(615,2680)
  Bottom Layer w10: v1(580,3940) 600,3920 v1(600,3315) 600,2723.18 615,2708.18 v1(615,2680) 615,2170.59 v1(557.2,2112.8) 557.2,2002.2 526,1971 526,1867.48 615.21,1778.28 1205.97,1778.28 1274.24,1710 1860,1710 U1.GP11@1975,1595
POW_EN: S1.2 U14.1 | length 2738.3
  Top Layer w15: S1.2@595,1710 1020,1710 1350,1380 1350,720 1470,600 2104.7,600 2169.7,665 U14.1@2460,665
SOFT_KILL: B?.2 U1.GP0 | length 456.3
  Top Layer w10: B?.2@3070,1925 3350.31,1644.69 3350.31,1619.69 U1.GP0@3375,1595
SRC_DRV_U_Current_Source1: R13_U_Current_Source1.2 U15_U_Current_Source1.2 U15_U_Current_Source1.6 | length 840.6
  Top Layer w10: U15_U_Current_Source1.2@788.5,4373.15 788.5,4359.37 760.63,4331.5 678.5,4331.5 648.5,4361.5 648.5,4591.5 718.5,4661.5 803.5,4661.5 832.68,4632.32 832.68,4585.67 U15_U_Current_Source1.6@838.5,4579.84 838.5,4593.62 871.38,4626.5 R13_U_Current_Source1.2@963.82,4626.5
SRC_DRV_U_Current_Source2: R13_U_Current_Source2.2 U15_U_Current_Source2.2 U15_U_Current_Source2.6 | length 840.6
  Top Layer w10: U15_U_Current_Source2.2@822.6,3749.41 822.6,3735.63 794.72,3707.76 712.6,3707.76 682.6,3737.76 682.6,3967.76 752.6,4037.76 837.6,4037.76 866.77,4008.58 866.77,3961.93 U15_U_Current_Source2.6@872.6,3956.1 872.6,3969.88 905.47,4002.76 R13_U_Current_Source2.2@997.91,4002.76
SRC_DRV_U_Current_Source3: R13_U_Current_Source3.2 U15_U_Current_Source3.2 U15_U_Current_Source3.6 | length 840.6
  Top Layer w10: U15_U_Current_Source3.2@824.69,3121.65 824.69,3107.87 796.81,3080 714.69,3080 684.69,3110 684.69,3340 754.69,3410 839.69,3410 868.86,3380.83 868.86,3334.17 U15_U_Current_Source3.6@874.69,3328.35 874.69,3342.13 907.56,3375 R13_U_Current_Source3.2@1000,3375
SRC_DRV_U_Current_Source4: R13_U_Current_Source4.2 U15_U_Current_Source4.2 U15_U_Current_Source4.6 | length 840.6
  Top Layer w10: U15_U_Current_Source4.2@815,2486.65 815,2472.87 787.13,2445 705,2445 675,2475 675,2705 745,2775 830,2775 859.17,2745.83 859.17,2699.17 U15_U_Current_Source4.6@865,2693.35 865,2707.13 897.87,2740 R13_U_Current_Source4.2@990.31,2740
STIM_0: J1.1 T1.6 | length 1421.5
  Top Layer w10: T1.6@1640,5065 2235,4470 J1.1@2815,4470
STIM_1: J2.1 T2.6 | length 1359.3
  Top Layer w10: T2.6@1640,4265 2085,3820 J2.1@2815,3820
STIM_2: J3.1 T3.6 | length 1297.2
  Top Layer w10: T3.6@1640,3465 1935,3170 J3.1@2815,3170
STIM_3: J4.1 T4.6 | length 1235.1
  Top Layer w10: T4.6@1640,2665 1745,2665 1890,2520 J4.1@2815,2520
SW_OUT: D6.2 L1.1 R1.1 R2.1 U9.5 | length 816.9
  Top Layer w15: L1.1@1225,260 1362.72,260 1398.03,295.32 R1.1@1400,295.32 1716.99,295.32 1740,318.33 D6.2@1740,327.01 1825.35,327.01 1913.03,414.68 R2.1@1915,414.68 1915.16,414.84 1972.42,414.84 U9.5@1972.58,415
TC: R3.1 U9.8 | length 59.5
  Top Layer w10: R3.1@1915,260.32 1917.34,262.66 1970.24,262.66 U9.8@1972.58,265
TF_LOW1: R7_U_Current_Measure1.2 T1.4 U2_U_Current_Measure1.3 | length 458.5
  Top Layer w10: T1.4@2240,5065 2447.01,4857.99 R7_U_Current_Measure1.2@2550.31,4857.99 2553.21,4855.1 2553.21,4831.18 2557.2,4827.19 U2_U_Current_Measure1.3@2557.2,4798.43
TF_LOW2: R7_U_Current_Measure2.2 T2.4 U2_U_Current_Measure2.3 | length 420
  Top Layer w10: T2.4@2240,4265 2330,4175 R7_U_Current_Measure2.2@2560.31,4175 2563.21,4172.11 2563.21,4148.19 2567.2,4144.19 U2_U_Current_Measure2.3@2567.2,4115.43
TF_LOW3: R7_U_Current_Measure3.2 T3.4 U2_U_Current_Measure3.3 | length 418
  Top Layer w10: T3.4@2240,3465 2312.99,3537.99 R7_U_Current_Measure3.2@2565.31,3537.99 2568.21,3535.1 2568.21,3511.18 2572.2,3507.19 U2_U_Current_Measure3.3@2572.2,3478.43
TF_LOW4: R7_U_Current_Measure4.2 T4.4 U2_U_Current_Measure4.3 | length 480.7
  Top Layer w10: T4.4@2240,2665 2464.53,2889.53 R7_U_Current_Measure4.2@2565.31,2889.53 2568.21,2886.63 2568.21,2862.72 2572.2,2858.72 U2_U_Current_Measure4.3@2572.2,2829.96
VBAT: P1.1 S1.3 U14.2 | length 2945.4
  Top Layer w15: S1.3@595,1895.04 919.96,1895.04 1380,1435 1380,780 1505,655 P1.1@1570,655 1611.03,696.03 1811.17,696.03 1852.2,655 v6(1855,655) 1919.26,719.26 2505.74,719.26 U14.2@2560,665
XTAL: C7.2 R9.1 U10.2 X1.1 | length 250
  Top Layer w10: U10.2@1204.72,1965.31 1205.45,1964.59 1243.75,1964.59 1278.03,1930.32 R9.1@1280,1930.32 1281.97,1930.32 1300,1912.28 C7.2@1300,1879.69 1304.84,1874.84 1326.61,1874.84 1374.45,1827.01 X1.1@1378.39,1827.01
pads on no net: H1.M4 H2.M4 H3.M4 H4.M4 L1.2 T1.2 T1.5 T2.2 T2.5 T3.2 T3.5 T4.2 T4.5 U1.ADC_VREF U1.GP1 U1.RUN U10.6 U10.9 U11_U_Current_Source1.5 U11_U_Current_Source1.9@1173.5,4656.5 U11_U_Current_Source2.5 U11_U_Current_Source2.9@1207.6,4032.76 U11_U_Current_Source3.5 U11_U_Current_Source3.9@1209.69,3405 U11_U_Current_Source4.5 U11_U_Current_Source4.9@1200,2770 U12_U_Current_Source1.5 U12_U_Current_Source1.9@1123.5,4436.5 U12_U_Current_Source2.5 U12_U_Current_Source2.9@1157.6,3812.76 U12_U_Current_Source3.5 U12_U_Current_Source3.9@1159.69,3185 U12_U_Current_Source4.5 U12_U_Current_Source4.9@1150,2550 U14.M1 U15_U_Current_Source1.5 U15_U_Current_Source1.9@813.5,4476.5 U15_U_Current_Source2.5 U15_U_Current_Source2.9@847.6,3852.76 U15_U_Current_Source3.5 U15_U_Current_Source3.9@849.69,3225 U15_U_Current_Source4.5 U15_U_Current_Source4.9@840,2590 U17.5 U17.9@900,5000

## Polygon pours and split planes (outlines as drawn)
3V3 on Layer 1 "3V3_L02_P004" (solid, remove dead copper, pour order 4): 175,5285 3355,5285 3530,5110 3530,175 3355,0 175,0 0,175 0,5110
5V on Layer 1 "5V_L02_P002" (solid, remove dead copper, pour order 2): 675,4974.41 1240.59,4974.41 1500,4715 1645,4715 2145,4215 2145,1280 2815,610 3140,610 3300,770 3310,760 3420,760 3420,570 3155,305 1860,305 760,1460 760,1575 760,2635 710,2685 710,2825 770,2885 770,3200 720,3250 720,3465 770,3515 770,3795 725,3840 725,4090 755,4120 755,4415 675,4495
AGND on Layer 1 "AGND_L02_P001" (solid, remove dead copper, pour order 1): 2465,4835 2680,4835 2680,4760 2725,4715 2725,2580 2630,2485 2630,2450 2635,2445 2650,2460 2800,2460 2820,2440 2820,2235 2785,2200 2540,2200 2495,2245 2495,2450 2550,2450 2660,2560 2660,2680 2570,2770 2470,2770 2470,3000 2670,3200 2670,3275 2525,3420 2470,3420 2470,3640 2665,3835 2665,3905 2515,4055 2465,4055 2465,4340 2650,4525 2650,4600 2510,4740 2455,4740 2455,4825
GND on Layer 2 "GND_L03_P000" (solid, remove dead copper, pour order 0): 175,5285 3355,5285 3530,5110 3530,175 3355,0 175,0 0,175 0,5110
3V3 on Bottom Layer "3V3_L04_P006" (solid, remove dead copper, pour order 6): 700,2315 700,2120 625,2045 625,1840 660,1805 1250,1805 1250,1810 1485,2045 1485,2070 1410,2145 1085,2145 915,2315
5V on Bottom Layer "5V_L04_P005" (solid, remove dead copper, pour order 5): 1420,2150 1535,2035 1535,1945 1585,1895 1765,1895 1880,2010 1880,2235 1820,2295 1165,2295 1130,2260 1130,2150

## Silkscreen, mask and mechanical layers (free items; w line width, h text height)
Mechanical 1:
  the board outline again, w10